# EAGLE board Uno_v1.0 (EAGLE 9.6.2)
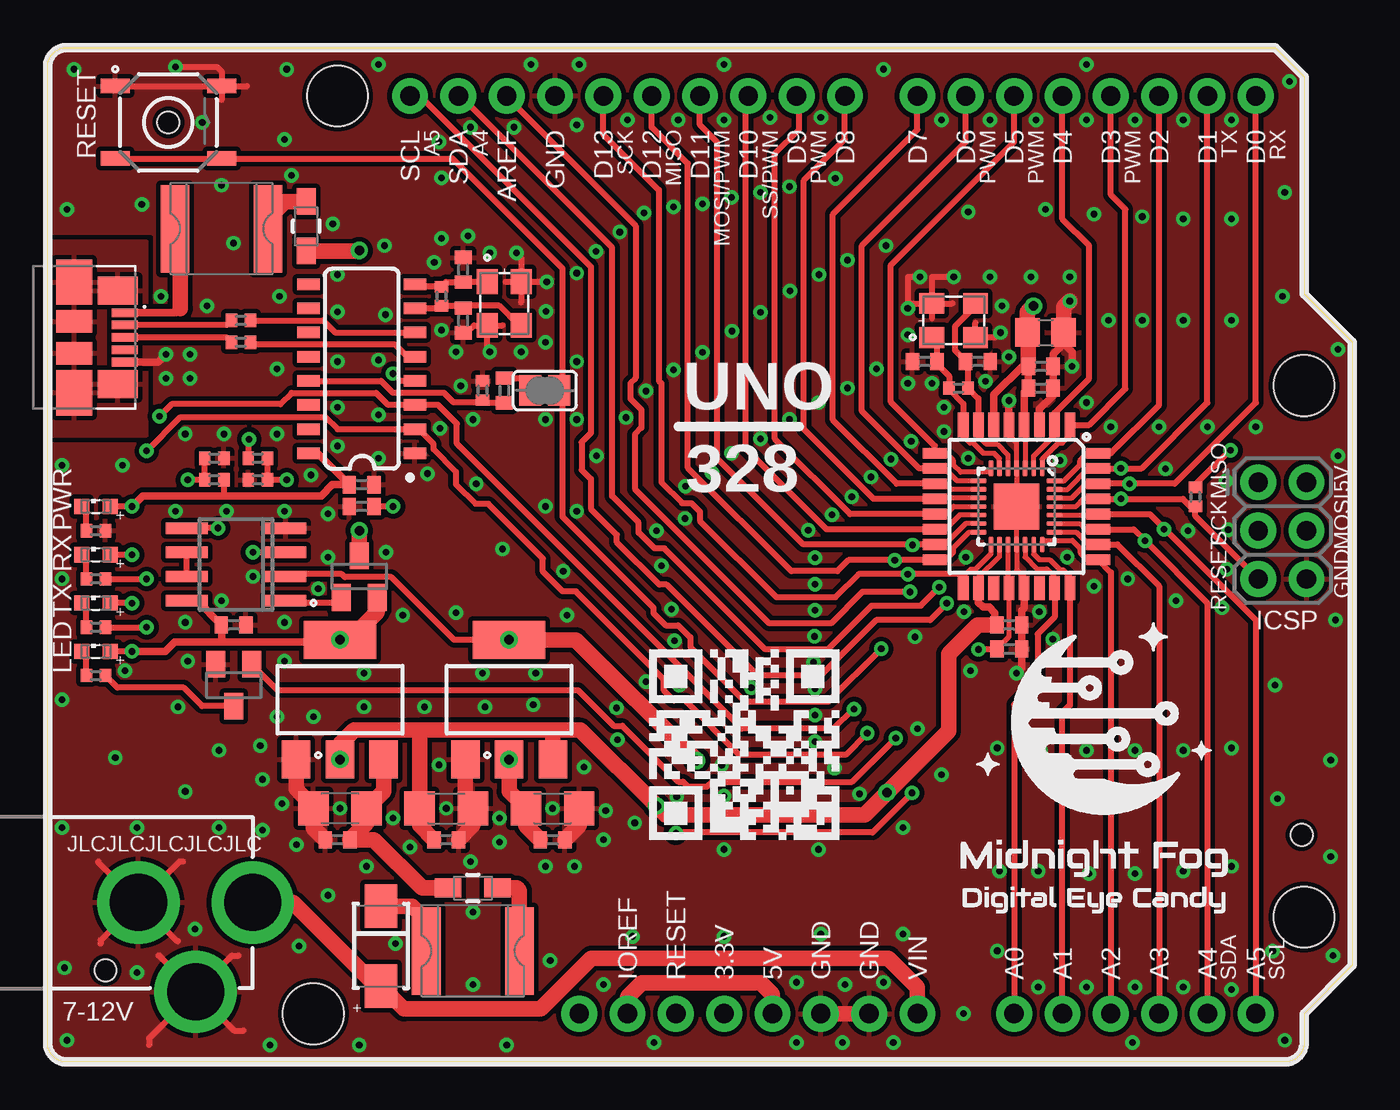
[diagram p0: board, top side]
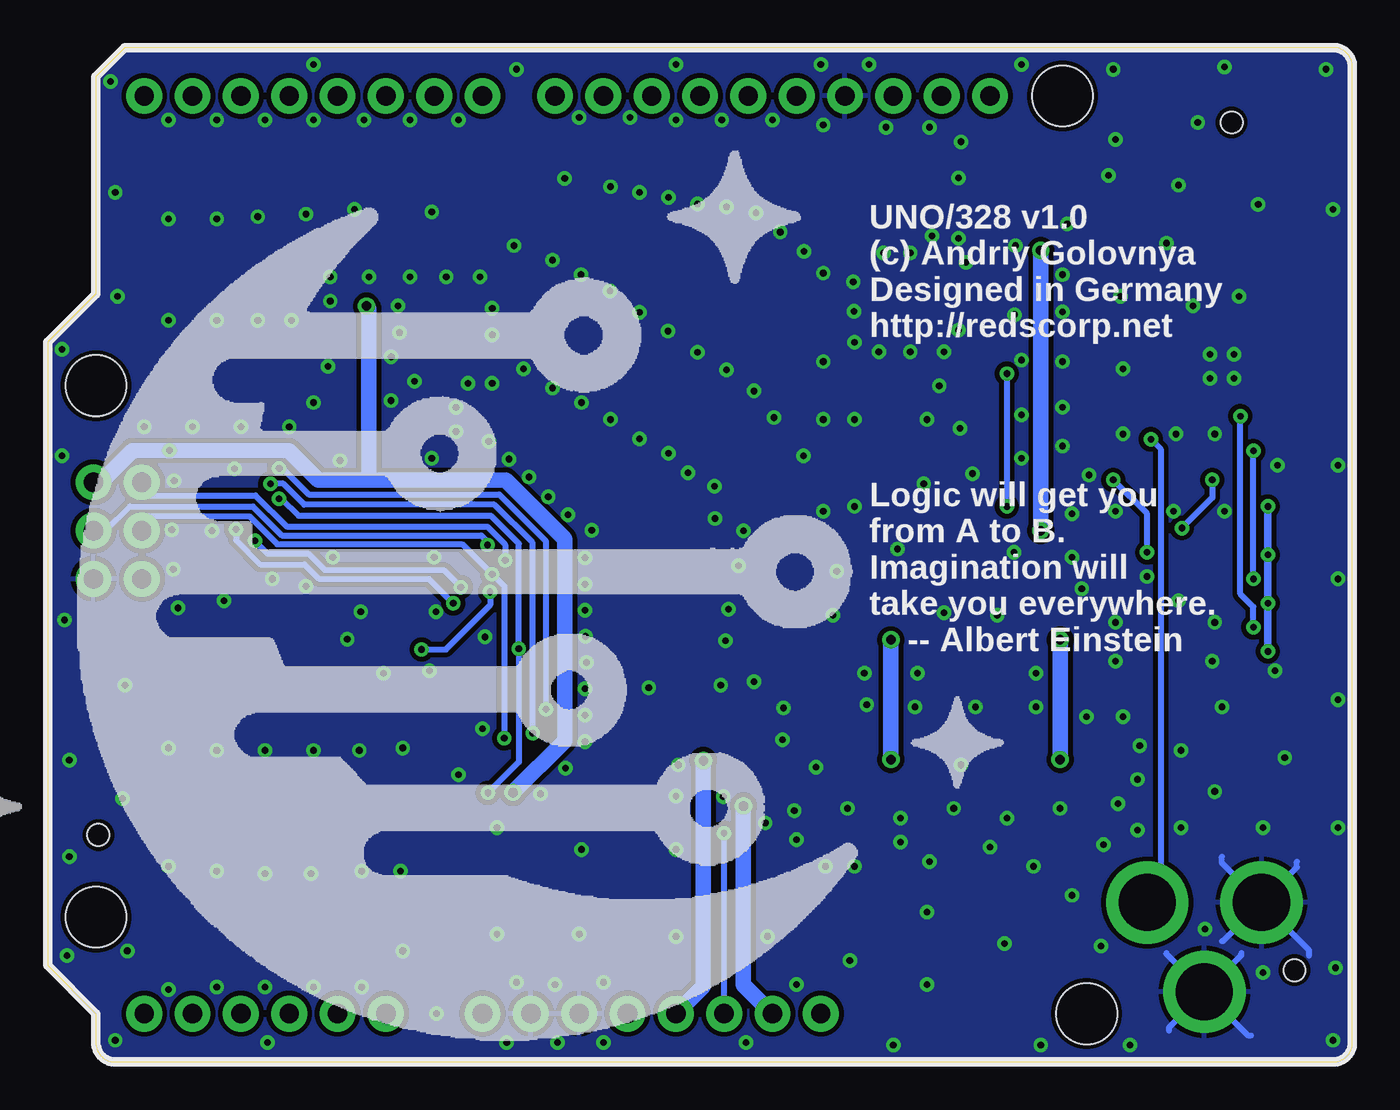
[diagram p1: board, bottom side, seen from below]

Size 68.58 x 53.34 mm. Coordinates in mm from the lower left corner, seen from the top.
Outline: 64.52,53.34 66.04,51.82 66.04,40.39 68.58,37.85 68.58,5.08 66.04,2.54 66.04,1 arc-90 65.04,0 1,0 arc-90 0,1 0,52.34 arc-90 1,53.34 64.52,53.34
Copper layers (1*16): Top 0.035mm / dielectric 1.5mm / Bottom 0.035mm
Design rules "default *": minimum track width 6mil, minimum drill 0.35mm, track to track 6mil, track to pad 6mil, pad to pad 6mil, via to via 6mil, smd to smd 6mil, copper to edge 10mil, drill to drill 6mil, minimum pad ring 10mil, minimum via ring 8mil, stop-mask expansion 4mil, vias tented up to drill 20mil, thermal gap 10mil
Net classes: 1 XUSB: width 0.305 mm; 2 USB: width 0.305 mm; 3 POWER: width 0.305 mm
Holes 3.2 mm at 13.97,2.54 15.24,50.8 66.04,7.62 66.04,35.56

## Footprints (pad centres in the part's own frame; a part is rotated, then mirrored left to right if it is on the bottom)
C1206 = smd 1.6 x 1.8: 1 -1.4,0; 2 1.4,0
C0402 = smd 0.7 x 0.9: 1 -0.65,0; 2 0.65,0
C0805 = smd 1.3 x 1.5: 1 -0.95,0; 2 0.95,0
POWER_JACK_PTH = drill 2.997 pad 4.318: GND 0,7.7; GNDBREAK 4.7,10.7; PWR 0,13.7
MOLEX_47346-0001 = smd 0.45 x 1.38: 1 -1.3,2.66; 2 -0.65,2.66; 3 0,2.66; 4 0.65,2.66; 5 1.3,2.66 | smd 1.475 x 2.1: SH1 -2.462,2.3; SH2 2.462,2.3 | smd 2.375 x 1.9: SH3 -2.913,0; SH6 2.913,0 | smd 1.175 x 1.9: SH4 -0.838,0; SH5 0.838,0
1X10_NO_SILK = drill 1.016 pad 1.88: 1 0,0; 2 2.54,0; 3 5.08,0; 4 7.62,0; 5 10.16,0; 6 12.7,0; 7 15.24,0; 8 17.78,0; 9 20.32,0; 10 22.86,0
1X08_NO_SILK = drill 1.016 pad 1.88: 1 0,0; 2 2.54,0; 3 5.08,0; 4 7.62,0; 5 10.16,0; 6 12.7,0; 7 15.24,0; 8 17.78,0
2X3-NS = drill 1.016 pad 1.88: 1 -2.54,-1.27; 2 -2.54,1.27; 3 0,-1.27; 4 0,1.27; 5 2.54,-1.27; 6 2.54,1.27
1X06_NO_SILK = drill 1.016 pad 1.88: 1 0,0; 2 2.54,0; 3 5.08,0; 4 7.62,0; 5 10.16,0; 6 12.7,0
WE-TVSP_DO-214AC_UNIDIRECTIONAL = smd 2.3 x 1.7: 1 -2.1,0; 2 2.1,0
MF-SMDF050 = smd 1.5 x 4.6: 1 -2.45,0; 2 2.45,0
TOOLING-HOLE = hole 1.153: 0,0
SOT223 = smd 1.5 x 2: 1 -2.3,-3.15; 2 0,-3.15; 3 2.3,-3.15 | smd 3.8 x 2: 4 0,3.15
SO08 = smd 0.6 x 2.2: 1 -1.905,-2.6; 2 -0.635,-2.6; 3 0.635,-2.6; 4 1.905,-2.6; 5 1.905,2.6; 6 0.635,2.6; 7 -0.635,2.6; 8 -1.905,2.6
WE-CBA_0805(W=4) = smd 1.4 x 1: 1 -1.3,0; 2 1.3,0
SML0603 = smd 0.8 x 0.8: A 0.75,0; C -0.75,0
3.2X2.5_KX-7 = smd 1.3 x 1.1: 1 -1.15,-0.9; 2 1.15,-0.9; 3 1.15,0.9; 4 -1.15,0.9
R0402 = smd 0.6 x 0.7: 1 -0.5,0; 2 0.5,0
TACTILE_SWITCH_SMD_5.2MM = smd 1.524 x 0.762: 1 -2.794,1.905; 2 2.794,1.905; 3 -2.794,-1.905; 4 2.794,-1.905
SJ = smd 1.168 x 1.6: 1 -0.762,0; 2 0.762,0
SOT23 = smd 1 x 1.4: 1 -0.95,-1.1; 2 0.95,-1.1; 3 0,1.1
SO016 = smd 0.6 x 1.2: 1 -4.445,-2.8; 2 -3.175,-2.8; 3 -1.905,-2.8; 4 -0.635,-2.8; 5 0.635,-2.8; 6 1.905,-2.8; 7 3.175,-2.8; 8 4.445,-2.8; 9 4.445,2.8; 10 3.175,2.8; 11 1.905,2.8; 12 0.635,2.8; 13 -0.635,2.8; 14 -1.905,2.8; 15 -3.175,2.8; 16 -4.445,2.8
TQFP32-08 = smd 1.27 x 0.559: 1 -4.293,2.8; 2 -4.293,2; 3 -4.293,1.2; 4 -4.293,0.4; 5 -4.293,-0.4; 6 -4.293,-1.2; 7 -4.293,-2; 8 -4.293,-2.8; 17 4.293,-2.8; 18 4.293,-2; 19 4.293,-1.2; 20 4.293,-0.4; 21 4.293,0.4; 22 4.293,1.2; 23 4.293,2; 24 4.293,2.8 | smd 0.559 x 1.27: 9 -2.8,-4.293; 10 -2,-4.293; 11 -1.2,-4.293; 12 -0.4,-4.293; 13 0.4,-4.293; 14 1.2,-4.293; 15 2,-4.293; 16 2.8,-4.293; 25 2.8,4.293; 26 2,4.293; 27 1.2,4.293; 28 0.4,4.293; 29 -0.4,4.293; 30 -1.2,4.293; 31 -2,4.293; 32 -2.8,4.293
VQFN-28 = smd 0.82 x 0.24: 1 -2,1.35; 2 -2,0.9; 3 -2,0.45; 4 -2,0; 5 -2,-0.45; 6 -2,-0.9; 7 -2,-1.35; 15 2,-1.35; 16 2,-0.9; 17 2,-0.45; 18 2,0; 19 2,0.45; 20 2,0.9; 21 2,1.35 | smd 0.24 x 0.82: 8 -1.35,-2; 9 -0.9,-2; 10 -0.45,-2; 11 0,-2; 12 0.45,-2; 13 0.9,-2; 14 1.35,-2; 22 1.35,2; 23 0.9,2; 24 0.45,2; 25 0,2; 26 -0.45,2; 27 -0.9,2; 28 -1.35,2 | smd 2.4 x 2.4: PAD 0,0

## Placement (x,y rotation side)
C1  47uF  [C1206]  15.37,13.34 180 top
C2  47uF  [C1206]  20.95,13.34 0 top
C3  47uF  [C1206]  26.54,13.34 0 top
C4  100nF  [C0402]  15.24,11.68 180 top
C5  100nF  [C0402]  20.95,11.68 0 top
C6  100nF  [C0402]  26.54,11.68 0 top
C7  100nF  [C0402]  16.51,29.21 0 top
C8  100nF  [C0402]  16.51,30.35 0 top
C9  12pF  [C0402]  21.84,38.99 90 top
C10  12pF  [C0402]  21.84,41.66 270 top
C11  100nF  [C0402]  9.78,22.99 0 top
C12  12pF  [C0402]  48.9,36.83 180 top
C13  12pF  [C0402]  46.1,36.83 0 top
C14  100nF  [C0402]  52.2,36.58 0 top
C15  100nF  [C0402]  52.2,35.43 0 top
C16  100nF  [C0402]  50.55,22.99 0 top
C17  10uF  [C0805]  52.45,38.35 0 top
C18  100nF  [C0402]  24,35.31 90 top
C19  100nF  [C0402]  50.55,21.72 0 top
CN1  POWER_JACK  [POWER_JACK_PTH]  -2.92,8.38 270 top
CN2  47346-0001  [MOLEX_47346-0001]  1.4,38.1 270 top
CN3  DIGITAL10  [1X10_NO_SILK]  19.05,50.8 0 top
CN4  DIGITAL8  [1X08_NO_SILK]  45.72,50.8 0 top
CN5  ICSP  [2X3-NS]  64.9,27.94 270 top
CN6  POWER8  [1X08_NO_SILK]  45.72,2.54 180 top
CN7  ANALOG6  [1X06_NO_SILK]  63.5,2.54 180 top
D1  M7  [WE-TVSP_DO-214AC_UNIDIRECTIONAL]  17.53,6.1 270 top
F1  1812L050/30PR  [MF-SMDF050]  22.35,5.84 0 top
F2  1812L050/30PR  [MF-SMDF050]  9.14,43.81 0 top
HOLE1  TOOLINGHOLE  [TOOLING-HOLE]  6.35,49.4 0 top
HOLE2  TOOLINGHOLE  [TOOLING-HOLE]  3.05,4.83 0 top
HOLE3  TOOLINGHOLE  [TOOLING-HOLE]  65.91,11.94 0 top
IC1  AMS1117-5.0  [SOT223]  15.37,19.05 0 top
IC2  AMS1117-3.3  [SOT223]  24.26,19.05 0 top
IC3  LM358D  [SO08]  9.91,26.16 90 top
L1  GZ2012D601TF  [WE-CBA_0805(W=4)]  22.35,9.14 180 top
L2  GZ2012D601TF  [WE-CBA_0805(W=4)]  13.59,43.94 270 top
LED1  GREEN  [SML0603]  2.54,29.21 0 top
LED2  BLUE  [SML0603]  2.54,26.67 0 top
LED3  BLUE  [SML0603]  2.54,24.13 0 top
LED4  YELLOW  [SML0603]  2.54,21.59 0 top
LOGO1  MFDECLOGO_SQ_10MM  [MFDEC_SQ_10MM]  46.99,7.37 0 top
LOGO2  MFDECLOGO_L_40MM  [MFDEC_L_40MM]  78.74,-2.54 0 bottom  (outside the outline)
LOGO3  RSNURL_QR_10MM  [RSNURL_QR_10MM]  31.62,11.68 0 top
Q1  12MHz  [3.2X2.5_KX-7]  24,39.88 270 top
Q2  16MHz  [3.2X2.5_KX-7]  47.62,38.99 0 top
R1  22R  [R0402]  10.16,38.99 0 top
R2  22R  [R0402]  10.16,37.85 0 top
R3  1M  [R0402]  20.7,40.26 270 top
R4  100K  [R0402]  11.05,31.75 180 top
R5  100K  [R0402]  11.05,30.61 0 top
R6  1M  [R0402]  47.88,35.43 0 top
R7  1K  [R0402]  2.54,27.94 180 top
R8  1K  [R0402]  2.54,25.4 180 top
R9  1K  [R0402]  2.54,22.86 180 top
R10  1K  [R0402]  2.54,20.32 180 top
R11  1K  [R0402]  22.86,35.31 270 top
R12  10K  [R0402]  60.33,29.72 90 top
R13  100K  [R0402]  8.76,30.61 0 top
R14  100K  [R0402]  8.76,31.75 180 top
S1  RESET  [TACTILE_SWITCH_SMD_5.2MM]  6.35,49.4 0 top
SJ1  USB_RESET  [SJ]  26.14,35.31 0 top
T1  AO3401A  [SOT23]  16.38,25.53 0 top
T2  2N7002  [SOT23]  9.78,19.81 180 top
U1  CH340G  [SO016]  16.51,36.45 90 top
U2  ATMEGA328P-AU  [TQFP32-08]  50.93,29.21 270 top
U3  ATMEGA328P-MU  [VQFN-28]  50.93,29.21 270 top

## Library data of the parts
C1-C19 = rcl; SPICEPREFIX: C
CN1 = SparkFun-Connectors; PROD_ID: CONN-08197
CN2 = SnapEDA-Library; MANUFACTURER: Molex
CN3 CN5 = SparkFun-Connectors
CN4 CN6 = SparkFun-Connectors; PROD_ID: CONN-08438
CN7 = SparkFun-Connectors; PROD_ID: CONN-08437
D1 = Wurth_EMC Components_WE-TVSP; DATASHEET-URL: -; IPEAK: 1.0A; MOUNT: SMT; PART-NUMBER: 824500252; PDISS: 400W; VBR: 294V; VCLAMP: 405V
F1 F2 = fuse
HOLE1-HOLE3 = _my_fiducia
IC1 IC2 = v-reg
IC3 = linear
L1 L2 = Wurth_Automotive_WE-CBA; DATASHEET-URL: https://www.we-online.com/catalog/datasheet/782853102.pdf; IR1: 1000mA; MOUNT: SMT; PART-NUMBER: 782853102; RDC-MAX: 0.3Ohm; TYPE: High Current; ZMAX: 1000Ohm
LED1-LED4 = led
LOGO1-LOGO3 = _my_logos
Q1 Q2 = crystal-geyer_V1_0
R1-R14 = rcl; SPICEPREFIX: R
S1 = SparkFun-Switches; PROD_ID: SWCH-08247; SF_SKU: COM-08720
SJ1 = _my_jumpers
T1 = Transistor; CATEGORY: Transistor; SUB-CATEGORY: MOSFET; TYPE: P-Channel
T2 = Transistor; CATEGORY: Transistor; SUB-CATEGORY: MOSFET; TYPE: N-Channel
U1 = SparkFun-IC-Comms; PROD_ID: IC-13498
U2 = SparkFun-IC-Microcontroller; PROD_ID: IC-09069
U3 = SparkFun-IC-Microcontroller

## Nets
3.3V [POWER]: C3.1 C6.1 CN6.5 IC2.4 IC3.2
5V [POWER]: C2.1 C5.1 C8.1 C11.1 C14.1 C15.1 C16.1 C17.1 CN5.2 CN6.4 CN6.7 IC1.4 IC2.3 IC3.8 LED1.A LED2.A LED3.A LED4.A R12.2 R13.2 T1.2 U1.16 U2.4 U2.6 U2.18 U3.3 U3.16
A0: CN7.6 U2.23 U3.19
A1: CN7.5 U2.24 U3.20
A2: CN7.4 U2.25 U3.21
A3: CN7.3 U2.26 U3.22
A4_SDA: CN3.2 CN7.2 U2.27 U3.23
A5_SCL: CN3.1 CN7.1 U2.28 U3.24
AREF: C19.1 CN3.3 U2.20 U3.17
D0_RX: CN4.8 R8.1 U1.2 U2.30 U3.26
D1_TX: CN4.7 R9.1 U1.3 U2.31 U3.27
D2: CN4.6 U2.32 U3.28
D3_PWM: CN4.5 U2.1 U3.1
D4: CN4.4 U2.2 U3.2
D5_PWM: CN4.3 U2.9 U3.7
D6_PWM: CN4.2 U2.10 U3.8
D7: CN4.1 U2.11 U3.9
D8: CN3.10 U2.12 U3.10
D9_PWM: CN3.9 U2.13 U3.11
D10_SS: CN3.8 U2.14 U3.12
D11_MOSI: CN3.7 CN5.4 U2.15 U3.13
D12_MISO: CN3.6 CN5.1 U2.16 U3.14
D13_SCK: CN3.5 CN5.3 T2.1 U2.17 U3.15
GND [POWER]: C1.2 C2.2 C3.2 C4.2 C5.2 C6.2 C7.1 C8.2 C9.1 C10.1 C11.2 C12.1 C13.1 C14.2 C15.2 C16.2 C17.2 C19.2 CN1.GND CN1.GNDBREAK CN2.5 CN3.4 CN5.6 CN6.2 CN6.3 IC1.1 IC2.1 IC3.4 R5.1 R7.1 R11.1 R14.1 S1.1 T2.2 U1.1 U2.3 U2.5 U2.21 U3.4 U3.18 U3.PAD
MCU_OSC_IN: C12.2 Q2.3 R6.2 U2.7 U3.5
MCU_OSC_OUT: C13.2 Q2.1 R6.1 U2.8 U3.6
N$1 [POWER]: IC3.5 R13.1 R14.2
N$2: D1.1 F1.1
N$3: F1.2 L1.1
N$4: F2.2 L2.1
N$5: C18.2 SJ1.1
N$6: C7.2 U1.4
N$7: LED1.C R7.2
N$8: IC3.1 T1.1
N$9: LED3.C R9.2
N$10: LED2.C R8.2
N$11: LED4.C R10.2
N$12: IC3.3 R4.1 R5.2
N$13: R10.1 T2.3
N$14: C1.1 C4.1 IC1.3 L1.2
N$15 [POWER]: IC3.6 IC3.7
RESET: CN5.5 CN6.6 R12.1 S1.3 SJ1.2 U2.29 U3.25
USB_D_M [USB]: R1.2 U1.6
USB_D_P [USB]: R2.2 U1.5
USB_DTR: C18.1 R11.2 U1.13
USB_OSC_IN: C9.2 Q1.3 R3.2 U1.7
USB_OSC_OUT: C10.2 Q1.1 R3.1 U1.8
USB_SHIELD: CN2.SH1 CN2.SH2 CN2.SH3 CN2.SH4 CN2.SH5 CN2.SH6
VIN [POWER]: CN1.PWR CN6.1 D1.2 R4.2
VUSB [POWER]: L2.2 T1.3
XUSB [POWER]: CN2.1 F2.1
XUSB_D_M [XUSB]: CN2.2 R1.1
XUSB_D_P [XUSB]: CN2.3 R2.1

## Tracks (layer width: path | path; a pad name or v marks a point on that pad's centre or on a via)
3.3V  (via drill 0.5)
  Top 0.305: IC2.4 21.36,22.2 18.07,25.5 15.63,25.5 15.47,25.65 13.51,25.65 13.38,25.53 IC3.2
  Top 0.813: v34.11,15.85 27.76,22.2 IC2.4 | v24.26,15.91 24.26,14.22 C3.1 25.14,12.43 C6.1
  Bottom 0.813: CN6.5 34.11,3.99 v34.11,15.85 | IC2.4 v24.26,15.91
  other vias: 24.26,22.2
5V  (via drill 0.35, 0.5)
  Top 0.254: U3.3 51.38,33.45 U2.4 | U2.18 48.93,25.46 50.03,26.56 U3.16
  Top 0.305: v4.45,21.59 LED4.A | v4.45,24.13 LED3.A | v4.45,26.67 LED2.A | v4.45,29.21 LED1.A | R13.2 9.27,30.6 9.27,29.76 | v62.18,32.16 62.12,32.16 60.33,30.36 R12.2
  Top 0.406: U2.4 51.33,35.21 C15.1 C14.1 51.22,36.58 49.73,35.09 U2.6 | U1.16 14.21,32 C8.1 14.97,30.35 14.38,29.76 9.27,29.76 5,29.76 v4.45,29.21 | C16.1 49.78,22.99 49.78,23.62 49.48,23.93 49.17,23.93 48.93,24.17 U2.18 | v4.45,21.59 6.17,21.59 6.68,22.1 9.14,22.1 | IC1.4 15.27,22.1 9.14,22.1 | IC3.8 7.86,24.26 C11.1 9.14,22.97 9.14,22.1
  Top 0.813: CN6.4 38.1,3.56 37.49,4.17 31.22,4.17 30.48,3.43 CN6.7 | T1.2 17.33,23.66 15.87,22.2 IC1.4 | C5.1 19.55,12.43 C2.1 19.55,17.46 19.56,17.46 | 26.54,17.46 28.01,17.46 v32,13.46 32.46,13.01 42.95,13.01 v44.12,14.17 47.35,17.4 47.35,21.44 48.9,22.99 49.78,22.99 | 26.54,17.46 19.56,17.46 | 19.56,17.46 16.13,17.46 15.37,16.7 v15.37,15.91 | IC2.3 26.56,17.45 26.54,17.46 | C14.1 51.55,38.31 C17.1 51.5,39.44 v51.82,39.75
  Bottom 0.406: v4.45,21.59 v4.45,24.13 v4.45,26.67 v4.45,29.21
  Bottom 0.813: v32,13.46 32,4.06 CN6.7 | IC1.4 v15.37,15.91 | v51.82,39.75 51.69,39.62 51.69,30.61 | CN5.2 65.79,30.48 64.11,32.16 v62.18,32.16 55.91,32.16 54.36,30.61 51.69,30.61 | 51.69,30.61 44.5,30.61 41.4,27.5 41.4,16.89 v44.12,14.17
  other vias: 15.37,22.2
A0
  Top 0.254: U2.23 52.93,25.52 52.51,25.93 52,25.93 51.38,26.55 U3.19
  Top 0.305: U2.23 52.93,23.39 52.04,22.5 52.04,20.03 50.8,18.8 CN7.6
A1
  Top 0.254: U3.20 51.83,26.7 52.11,26.42 52.66,26.42 53.2,25.89 53.36,25.89 53.73,25.52 U2.24
  Top 0.305: U2.24 53.73,18.77 53.34,18.38 CN7.5
A2
  Top 0.254: U3.21 52.28,27.34 52.37,27.43 53.86,27.43 54.25,27.03 54.25,26.8 54.64,26.41 U2.25
  Top 0.305: U2.25 55.88,25.75 CN7.4
A3
  Top 0.254: U2.26 55.21,27.2 54.72,27.2 54.06,27.86 U3.22
  Top 0.305: U2.26 56.23,27.21 58.42,25.02 CN7.3
A4_SDA  (via drill 0.35)
  Top 0.254: U3.23 54.24,28.31 54.54,28.01 U2.27
  Top 0.305: U2.27 57.08,28.01 v57.68,27.41 | CN7.2 60.96,24.13 v57.68,27.41 | v57.68,27.41 | CN3.2 21.69,50.8 29.67,42.82 29.67,29.76 31.07,28.36 31.07,27.84 31.9,27 32.42,27 37.73,21.69 41,21.69 43.31,24 45.9,24 v46.86,24.97
  Bottom 0.305: v57.68,27.41 57.68,27.38 57.02,26.72 54.87,26.72 54,25.86 47.75,25.86 v46.86,24.97
A5_SCL  (via drill 0.35)
  Top 0.254: U3.24 55.17,28.76 U2.28
  Top 0.305: CN3.1 19.56,50.8 28.55,41.81 28.55,33.07 28.07,32.59 28.07,31.14 28.55,30.66 28.55,29.09 29.92,27.71 29.92,27.33 32.15,25.1 32.54,25.1 37.31,20.32 40.64,20.32 43.56,23.24 46.38,23.24 v47.26,24.12 | U2.28 57.93,28.81 58.67,28.07 | CN7.1 63.5,23.24 58.67,28.07 | 58.67,28.07 v58.67,28.02
  Bottom 0.305: v47.26,24.12 48.54,25.4 54.32,25.4 55.09,26.17 57.41,26.17 58.67,27.43 v58.67,28.02
AREF  (via drill 0.35)
  Top 0.203: 50.48,24.97 U2.20
  Top 0.254: U2.20 50.53,22.35 C19.1 | U3.17 50.48,24.97
  Top 0.305: C19.1 49.87,21.69 v48.92,21.69 | CN3.3 24.13,50.75 30.91,43.97 30.91,35.97 30.64,35.69 30.64,34.87 31.21,34.29 31.21,33.35 30.86,32.99 30.86,30.14 37.93,23.07 41.18,23.07 42.83,24.72 v45.32,24.72
  Bottom 0.305: v48.92,21.69 47.65,21.69 45.32,24.02 v45.32,24.72
D0_RX  (via drill 0.35)
  Top 0.254: U2.30 55.21,30.42 54.6,30.42 53.83,29.66 U3.26
  Top 0.305: R8.1 v5.21,25.4 | v5.21,32.13 6.99,33.91 14.61,33.91 15.24,33.27 U1.2 19.5,33.27 20.29,32.49 20.29,32.22 21.47,31.04 21.47,30.38 22.5,29.34 23.17,29.34 26.04,26.47 26.04,25.78 27.07,24.74 27.77,24.74 32.39,20.12 32.39,19.53 32.91,19 33.51,19 36.35,16.16 41.94,16.16 v43.08,17.3 | CN4.8 63.5,34.67 59.24,30.41 v56.87,30.41 U2.30
  Bottom 0.305: v5.21,25.4 v5.21,32.13 | v43.08,17.3 43.11,17.33 43.11,27.33 45.09,29.31 55.09,29.31 56.19,30.41 v56.87,30.41
D1_TX  (via drill 0.35)
  Top 0.254: U2.31 55.21,31.22 54.72,31.22 53.61,30.11 U3.27
  Top 0.305: R9.1 v5.21,22.86 | v5.89,33.96 6.53,34.59 12.24,34.59 12.83,35.18 17.27,35.18 17.91,34.54 U1.3 20.52,34.54 21.51,33.56 21.51,32.52 36.49,17.53 41.3,17.53 42.32,18.55 v42.39,18.55 | U2.31 v56.41,31.21 57.5,31.21 60.96,34.67 CN4.7
  Bottom 0.305: v5.21,22.86 5.21,23.93 5.89,24.61 v5.89,33.96 | v56.41,31.21 56.23,31.21 54.86,29.84 44.85,29.84 42.39,27.38 v42.39,18.55
D2
  Top 0.254: U3.28 53.42,30.56 54.25,31.39 54.25,31.62 54.64,32.01 U2.32
  Top 0.305: U2.32 55.89,32.01 58.42,34.54 CN4.6
D3_PWM
  Top 0.254: U2.1 53.73,32.92 53.34,32.53 53.11,32.53 52.28,31.7 U3.1
  Top 0.305: U2.1 54.74,33.5 56.64,35.4 56.64,44.83 55.88,45.59 CN4.5
D4
  Top 0.254: U3.2 51.83,31.87 52.93,32.97 U2.2
  Top 0.305: U2.2 52.93,34.13 54.74,35.94 54.74,42.93 53.34,44.32 CN4.4
D5_PWM
  Top 0.254: U3.7 49.58,31.01 47.98,31.01 47.62,31.36 47.62,31.62 47.24,32 U2.9
  Top 0.305: U2.9 46.63,32.39 44.32,34.7 44.32,41.91 50.8,48.39 CN4.3
D6_PWM
  Top 0.254: U3.8 47.8,30.56 47.15,31.21 U2.10
  Top 0.305: U2.10 45.8,31.21 42.8,34.21 42.8,42.93 48.26,48.39 CN4.2
D7
  Top 0.254: U3.9 47.49,30.11 47.19,30.41 U2.11
  Top 0.305: U2.11 44.62,30.41 41.27,33.76 41.27,44.58 45.72,49.02 CN4.1
D8
  Top 0.203: 46.68,29.66 U2.12
  Top 0.254: U3.10 46.68,29.66
  Top 0.305: U2.12 43.41,29.61 39.75,33.27 39.75,46.35 41.91,48.51 CN3.10
D9_PWM
  Top 0.254: U2.13 47.23,28.81 47.62,29.21 U3.11
  Top 0.305: U2.13 42.18,28.81 38.23,32.77 38.23,47.75 39.5,49.02 39.5,50.67 CN3.9
D10_SS
  Top 0.254: U3.12 47.94,28.76 47.19,28.01 U2.14
  Top 0.305: U2.14 40.95,28.01 36.7,32.26 36.7,50.67 CN3.8
D11_MOSI  (via drill 0.35)
  Top 0.254: U3.13 48.25,28.31 47.15,27.21 U2.15
  Top 0.305: U2.15 45.49,27.21 v45.46,27.18 45.43,27.21 39.72,27.21 35.18,31.75 35.18,48.39 34.29,49.28 CN3.7
  Bottom 0.305: CN5.4 65.51,27.94 64.24,29.21 57.78,29.21 56.26,27.69 45.79,27.69 45.46,27.36 v45.46,27.18
D12_MISO  (via drill 0.35)
  Top 0.254: U2.16 47.24,26.41 47.62,26.8 47.62,27.05 48.43,27.86 U3.14
  Top 0.305: U2.16 46.61,26.39 v44.53,26.39 42.08,26.39 41.51,25.81 39.09,25.81 33.66,31.24 33.66,47.24 31.75,49.15 CN3.6
  Bottom 0.305: CN5.1 63.63,30.23 63.2,29.79 57.66,29.79 56.01,28.14 45.46,28.14 44.53,27.21 v44.53,26.39 | v44.53,26.39
D13_SCK  (via drill 0.35)
  Top 0.254: U3.15 49.58,26.72 48.77,25.91 48.51,25.91 48.13,25.52 U2.17
  Top 0.305: CN3.5 29.21,48.77 32.13,45.85 32.13,35.81 32.26,35.69 32.26,30.48 33.35,29.39 33.84,29.39 34.29,28.93 34.29,28.45 38.3,24.44 41.41,24.44 42.62,25.65 v45.21,25.65 48.13,25.65 U2.17 | T2.1 12.08,19.56 27.86,19.56 29.75,17.68 30.21,17.68 33.16,14.73 33.4,14.73 33.66,14.48 34.67,14.48 34.92,14.73 42.29,14.73 v44.58,17.02
  Bottom 0.305: CN5.3 63.63,28.32 63.25,28.7 57.99,28.7 56.52,27.23 46.79,27.23 v45.21,25.66 v45.21,25.65 44.58,25.02 v44.58,17.02
GND  (via drill 0.35)
  Top 0.254: U2.5 50.53,32.96 50.93,32.56 U3.4 50.93,29.97 | U2.21 51.33,25.46 50.93,25.86 U3.18 50.93,28.45
  Top 0.305: C9.1 22.03,38.34 22.42,38.73 23.9,38.73 | 24.06,41.02 v26.24,41.02 | 23.11,37.47 23.11,39.09 | S1.1 10.49,51.31 | v6.73,52.32 8.89,52.32 9.14,52.07 9.14,50.6 | v45.85,41.27 45.21,41.27 45.21,39.88 47.55,39.88 | v47.62,41.27 46.48,41.27 46.48,39.09 | v50.08,38.35 49.83,38.1 48.77,38.1 48.77,38.86 | v24.64,42.55 24.89,42.29 24.89,39.95 | CN1.GND 2.67,10.49 2.67,10.54 | CN1.GND 6.94,10.54 7.11,10.54 | CN1.GND 6.81,6.35 6.86,6.35 | CN1.GND 2.79,6.4 2.79,6.22 | CN1.GNDBREAK 9.69,5.59 10.03,5.59 | CN1.GNDBREAK 5.87,5.59 5.84,5.59 | CN1.GNDBREAK 5.33,1.24 5.33,0.89 | CN1.GNDBREAK 9.81,1.65 10.29,1.65
  Top 0.406: U2.21 51.33,23.88 51.2,23.75 C16.2 C19.2 51.2,20.72 v50.93,20.45 | U2.3 52.13,34.33 52.85,35.05 C15.2 C14.2 52.85,37.21 53.23,37.59 53.23,38.35 C17.2 53.4,37.78 53.85,37.34 v53.85,36.58 | U2.5 v50.53,34.78 v50.52,34.78 | CN2.5 5.81,36.8 v6.22,37.21
  Top 0.813: CN6.2 CN6.3 | IC1.1 13.07,14.36 14,13.37 | C3.2 27.94,12.43 C6.2 | C1.2 13.97,12.31 C4.2 | IC2.1 21.96,13.73 C2.2 22.36,12.43 C5.2 | C17.2 53.4,39.69 v53.72,40.01
  Bottom 0.305: CN1.GND 2.92,10.24 2.92,10.54 | CN1.GND 6.86,10.46 6.86,10.79 | CN1.GND 2.29,5.89 2.29,5.59 | CN1.GND 6.81,6.35 6.86,6.35 | CN1.GNDBREAK 5.84,5.62 5.84,5.71 | CN1.GNDBREAK 9.78,5.68 9.78,5.71 | CN1.GNDBREAK 9.65,1.81 9.65,1.65 | CN1.GNDBREAK 5.49,1.4 5.33,1.4
  other vias: 48.26,26.54 53.21,31.62 48.39,31.75 53.59,26.54 48.16,23.67 47.12,34.42 50.16,39.75 49.53,41.27 46.48,35.69 54.99,25.02 27.3,23.5 21.46,23.62 18.67,23.5 25.53,18.8 46.99,15.11 8.38,39.75 9.78,43.05 9.14,46.1 13.84,30.86 14.73,26.54 17.78,26.8 14.73,28.83 12.45,23.11 9.4,28.96 12.45,28.96 10.79,25.53 7.37,21.08 7.24,14.22 12.45,21.08 9.02,16.38 11.18,16.64 4.06,20.57 3.94,31.37 9.14,24.26 6.22,35.94 24.51,49.15 20.7,46.48 12.45,48.51 8.13,49.4 1.4,52.2 22.35,4.06 22.35,7.87 19.05,11.3 18.16,12.83 16.64,20.45 12.32,13.59 18.29,6.22 26.42,5.33 31.88,1.02 29.21,4.06 23.75,12.83 23.75,11.56 26.16,10.29 35.56,6.6 39.37,4.19 43.94,4.19 41.78,1.02 48.13,2.54 67.44,15.88 67.56,5.59 65.02,1.14 12.06,36.45 14.99,44.07 65.28,51.56 67.82,37.47 64.9,40.26 67.82,31.88 40.64,6.73 0.76,12.32 11.3,12.19 9.02,12.32 1.02,1.14 11.68,0.89 16.38,0.89 24.13,0.89 0.89,4.95 4.7,12.32 0.76,31.37 0.76,25.4 3.56,16 0.76,19.05 25.4,52.45 27.94,52.45 27.81,49.28 17.4,52.45 43.94,52.2 35.56,52.45 54.61,52.45 65.02,45.72 53.72,41.27 4.95,45.09 1.02,44.83 7.49,37.21 7.49,35.94 5.97,40.26 14.73,8.76 13.97,18.16 12.06,18.16 13.08,11.43 30.73,6.6 12.57,52.2 13.21,6.1 7.75,6.99 4.7,4.7 49.3,35.79 41.91,4.06 44.45,1.02 39.37,1.02 35.56,11.18 22.86,20.45 6.86,18.67 12.19,40.26 20.57,15.62 20.95,13.34 14.22,24.89 26.54,13.34 15.37,13.34 16.76,10.29 57.02,1.02 12.83,46.61 22.99,18.67 25.65,20.45 16.64,18.67 29.21,11.68 54.99,44.58 22.23,10.54 11.3,14.86 29.34,13.21 27.69,10.29 15.24,32.38 17.4,31.75 15.24,36.83 15.24,34.42 17.4,34.04 15.24,39.45 17.75,39.29 17.4,36.91 20.32,42.04 23.24,42.55 26.19,39.47 26.16,37.85 24.89,37.34 23.24,37.34 21.46,37.34 20.7,38.48 22.1,43.43 20.7,43.31 15.24,41.4 17.7,42.93 19.96,30.94 26.16,29.21 7.24,23.11 12.06,33.02 7.24,33.02 22.35,33.78 6.73,28.96 20.57,48.39 30.86,12.57 67.44,10.79 28.19,15.49 27.81,33.78 19.81,18.67 50.52,37.08 23.9,26.97 29.9,18.62 51.69,41.27 9.27,33.02 45.39,32.64 44.32,31.7 43.28,30.76 42.27,29.72 41.22,28.78 39.98,27.97 42.04,35.43 42.04,42.16 40.34,26.52 40.34,25.12 59.94,27.94 59.31,24.26 61.72,23.88 56.77,25.4 52.83,22.23 55.88,33.4 58.42,33.4 60.96,33.4 63.5,33.4 52.07,3.94 54.61,3.94 57.15,3.94 59.69,3.94 62.23,3.81 45.59,22.35 54.61,34.67 57.15,49.53 59.69,49.53 62.23,49.53 54.61,49.53 51.94,49.53 49.53,49.53 46.99,49.53 40.64,49.66 37.97,49.66 35.56,49.53 22.23,49.15 27.81,41.48 27.81,36.83 48.51,20.57 58.75,31.19 40.34,23.75 40.31,22.38 40.26,21.01 40.34,19.63 40.34,18.24 40.34,16.84 41.35,15.44 42.67,14.1 35.43,15.62 33.07,13.94 35.56,13.97 27.81,28.96 36.98,19.68 30.48,49.53 33.15,49.53 57.53,44.45 59.69,44.32 62.23,44.32 62.23,38.99 59.69,38.99 57.53,38.99 43.56,36.45 44.07,42.93 40.51,34.67 38.99,33.78 37.47,32.77 35.94,32 34.92,30.99 33.53,30.28 52.12,23.67 20.62,33.32 40.54,41.4 39.01,40.54 37.47,39.42 35.97,38.43 34.42,37.31 32.89,36.4 33.5,28.57 32,27.94 32.26,26.09 32.79,23.8 32.94,22.15 29.95,16.94 31.45,19.99 33.2,19.81 31.45,35.28 30.4,33.88 22.53,30.4 27.1,25.81 28.85,31.88 28.83,42.62 30.07,43.64 31.34,44.65 32.89,44.96 34.42,45.11 35.94,45.47 37.47,45.72 38.99,46.02 41.4,46.46 62.23,16.51 59.69,16.38 57.15,16.38 54.61,16.38 52.2,16.38 52.07,10.03 54.74,9.91 57.15,9.91 59.69,10.03 62.23,10.29 64.52,19.81 64.64,13.84 64.39,5.84 49.91,16.51 50.04,10.03 44.96,12.32 44.96,6.73 49.91,5.84 40.51,11.18 48.39,44.7 67.69,23.24 21.72,35.56 26.16,33.78 45.72,17.53 45.21,39.62 55.75,38.99 45.21,38.23 45.21,35.69 47.12,33.15 52.45,44.83 61.93,30.56 61.98,25.91 62.05,27.99
  pour Top (isolate 0.254, rank 2): 0,0 0,55.88 72.52,55.88 72.52,0
  pour Bottom (isolate 0.254, rank 2): 0,0 0,58.93 75.82,58.93 75.82,0
MCU_OSC_IN
  Top 0.254: U2.7 48.93,32.9 49.34,32.49 49.91,32.49 50.48,31.92 U3.5
  Top 0.305: U2.7 48.93,34.88 R6.2 48.37,36.7 C12.2 48.24,36.86 47.69,37.41 47.69,38.68 48.77,39.76 Q2.3
MCU_OSC_OUT
  Top 0.254: U3.6 50.03,31.74 49.76,32 49.19,32 48.66,32.53 48.49,32.53 48.13,32.9 U2.8
  Top 0.305: U2.8 48.13,34.6 47.38,35.35 R6.1 47.38,36.07 46.75,36.7 C13.2 46.75,37.59 46.48,37.87 Q2.1
N$1  (via drill 0.35)
  Top 0.305: v8.97,28.07 v8.96,28.07 IC3.5 | R14.2 R13.1 v7.37,30.61
  Bottom 0.305: v7.37,30.61 7.37,29.67 v8.97,28.07
N$2
  Top 0.813: D1.1 19.18,8.2 19.9,7.47 F1.1
N$3
  Top 0.813: L1.1 24.67,9.14 24.8,9.01 F1.2
N$4
  Top 0.813: L2.1 12.48,45.24 11.59,44.36 F2.2
N$5
  Top 0.305: C18.2 25,35.96 25.38,35.59 SJ1.1
N$6  (via drill 0.35)
  Top 0.305: U1.4 18.54,35.81 v18.16,36.2 | v18.16,29.21 C7.2
  Bottom 0.305: v18.16,36.2 v18.16,29.21
N$7
  Top 0.305: R7.2 2.04,28.96 LED1.C
N$8
  Top 0.305: T1.1 15.14,24.13 12.63,24.13 IC3.1
N$9
  Top 0.305: R9.2 2.04,23.88 LED3.C
N$10
  Top 0.305: R8.2 2.04,26.42 LED2.C
N$11
  Top 0.305: R10.2 2.04,21.34 LED4.C
N$12  (via drill 0.35)
  Top 0.305: R4.1 R5.2 v12.57,30.61 | IC3.3 v10.79,26.8
  Bottom 0.305: v10.79,26.8 10.79,28.83 v12.57,30.61
N$13
  Top 0.305: T2.3 8.13,18.71 7.16,19.68 3.67,19.68 R10.1
N$14
  Top 0.813: IC1.3 17.67,14.23 C1.1 16.77,12.56 C4.1 17.14,11.68 19.68,9.14 L1.2
N$15
  Top 0.305: IC3.7 IC3.6
RESET  (via drill 0.35)
  Top 0.152: SJ1.2 25.81,35.31
  Top 0.254: U2.29 55.21,29.62 54.47,29.62 54.06,29.21 U3.25
  Top 0.305: S1.3 21.29,47.5 27.05,41.73 27.05,35.46 SJ1.2 27.05,35.15 27.05,28.68 31.85,23.88 31.85,23.59 32.48,22.96 33.15,22.96 33.78,22.33 33.78,21.82 36.65,18.95 41.04,18.95 v43.81,21.73 | U2.29 v56.41,29.61 59.67,29.61 60.06,29.22 R12.1 60.33,28.7 CN5.5 | v45.44,14.15 43.36,12.06 33.05,12.06 v33.02,12.04
  Bottom 0.305: v56.41,29.61 56.29,29.61 55.4,28.73 45.28,28.73 43.81,27.26 v43.81,21.73 v43.81,21.72 43.81,15.78 v45.44,14.15 | CN6.6 v33.02,12.04
USB_D_M
  Top 0.305: U1.6 15.11,38.35 14.48,38.99 R1.2
USB_D_P
  Top 0.305: R2.2 10.79,37.72 18.28,37.72 18.91,37.08 U1.5
USB_DTR
  Top 0.305: C18.1 23.01,34.66 R11.2 22.73,34.68 21.34,34.68 20.84,35.18 18.16,35.18 17.53,35.81 U1.13
USB_OSC_IN
  Top 0.305: U1.7 20.57,39.62 R3.2 21.72,39.76 C9.2 21.97,39.77 23.74,39.77 24.78,38.73 Q1.3
USB_OSC_OUT
  Top 0.305: U1.8 19.45,40.76 R3.1 20.95,41.01 C10.2 23.08,41.01 Q1.1
USB_SHIELD
  pour Top (isolate 0.254): 5.21,39.88 3.05,39.88 3.05,36.32 5.21,36.32 5.21,32.89 0,32.89 0,43.18 5.21,43.18
VIN  (via drill 0.35)
  Top 0.305: v10.59,32.74 10.55,32.7 R4.2
  Top 0.813: CN1.PWR 12.89,8.38 17.27,4 D1.2 18.73,2.79 25.91,2.79 28.57,5.46 44.2,5.46 45.72,3.94 CN6.1
  Bottom 0.305: v10.59,32.74 10.08,32.23 10.08,9.08 CN1.PWR
VUSB  (via drill 0.5)
  Top 0.813: L2.2 16.38,42.64 v16.38,42.67 | v16.38,27.94 T1.3
  Bottom 0.813: v16.38,42.67 v16.38,27.94
XUSB
  Top 0.406: CN2.1 6.76,39.4 6.99,39.62
  Top 0.813: 6.99,39.62 6.99,43.52 F2.1
XUSB_D_M
  Top 0.305: CN2.2 9.42,38.75 R1.1
XUSB_D_P
  Top 0.305: CN2.3 9.41,38.1 R2.1

## Text on the board
tPlace: SCL | A5 | SDA | A4 | AREF | GND | D13 | SCK | D12 | MISO | D11 | MOSI/PWM | D10 | SS/PWM | D9 | PWM | D8 | D7 | D6 | PWM | D5 | PWM | D4 | D3 | PWM | D2 | D1 | TX | D0 | RX | RESET | UNO | 328 | MISO | 5V | PWR | + | SCK | MOSI | RX | + | RESET | GND | TX | + | ICSP | + | LED | JLCJLCJLCJLCJLC | IOREF | RESET | 3.3V | 5V | GND | GND | VIN | A0 | A1 | A2 | A3 | A4 | SDA | A5 | SCL | + | 7-12V
bPlace: UNO/328 v1.0 / (c) Andriy Golovnya / Designed in Germany / http://redscorp.net | Logic will get you / from A to B. / Imagination will / take you everywhere. / -- Albert Einstein